# EAGLE board Prairie_Dogs_V1.3 (EAGLE 9.6.2)
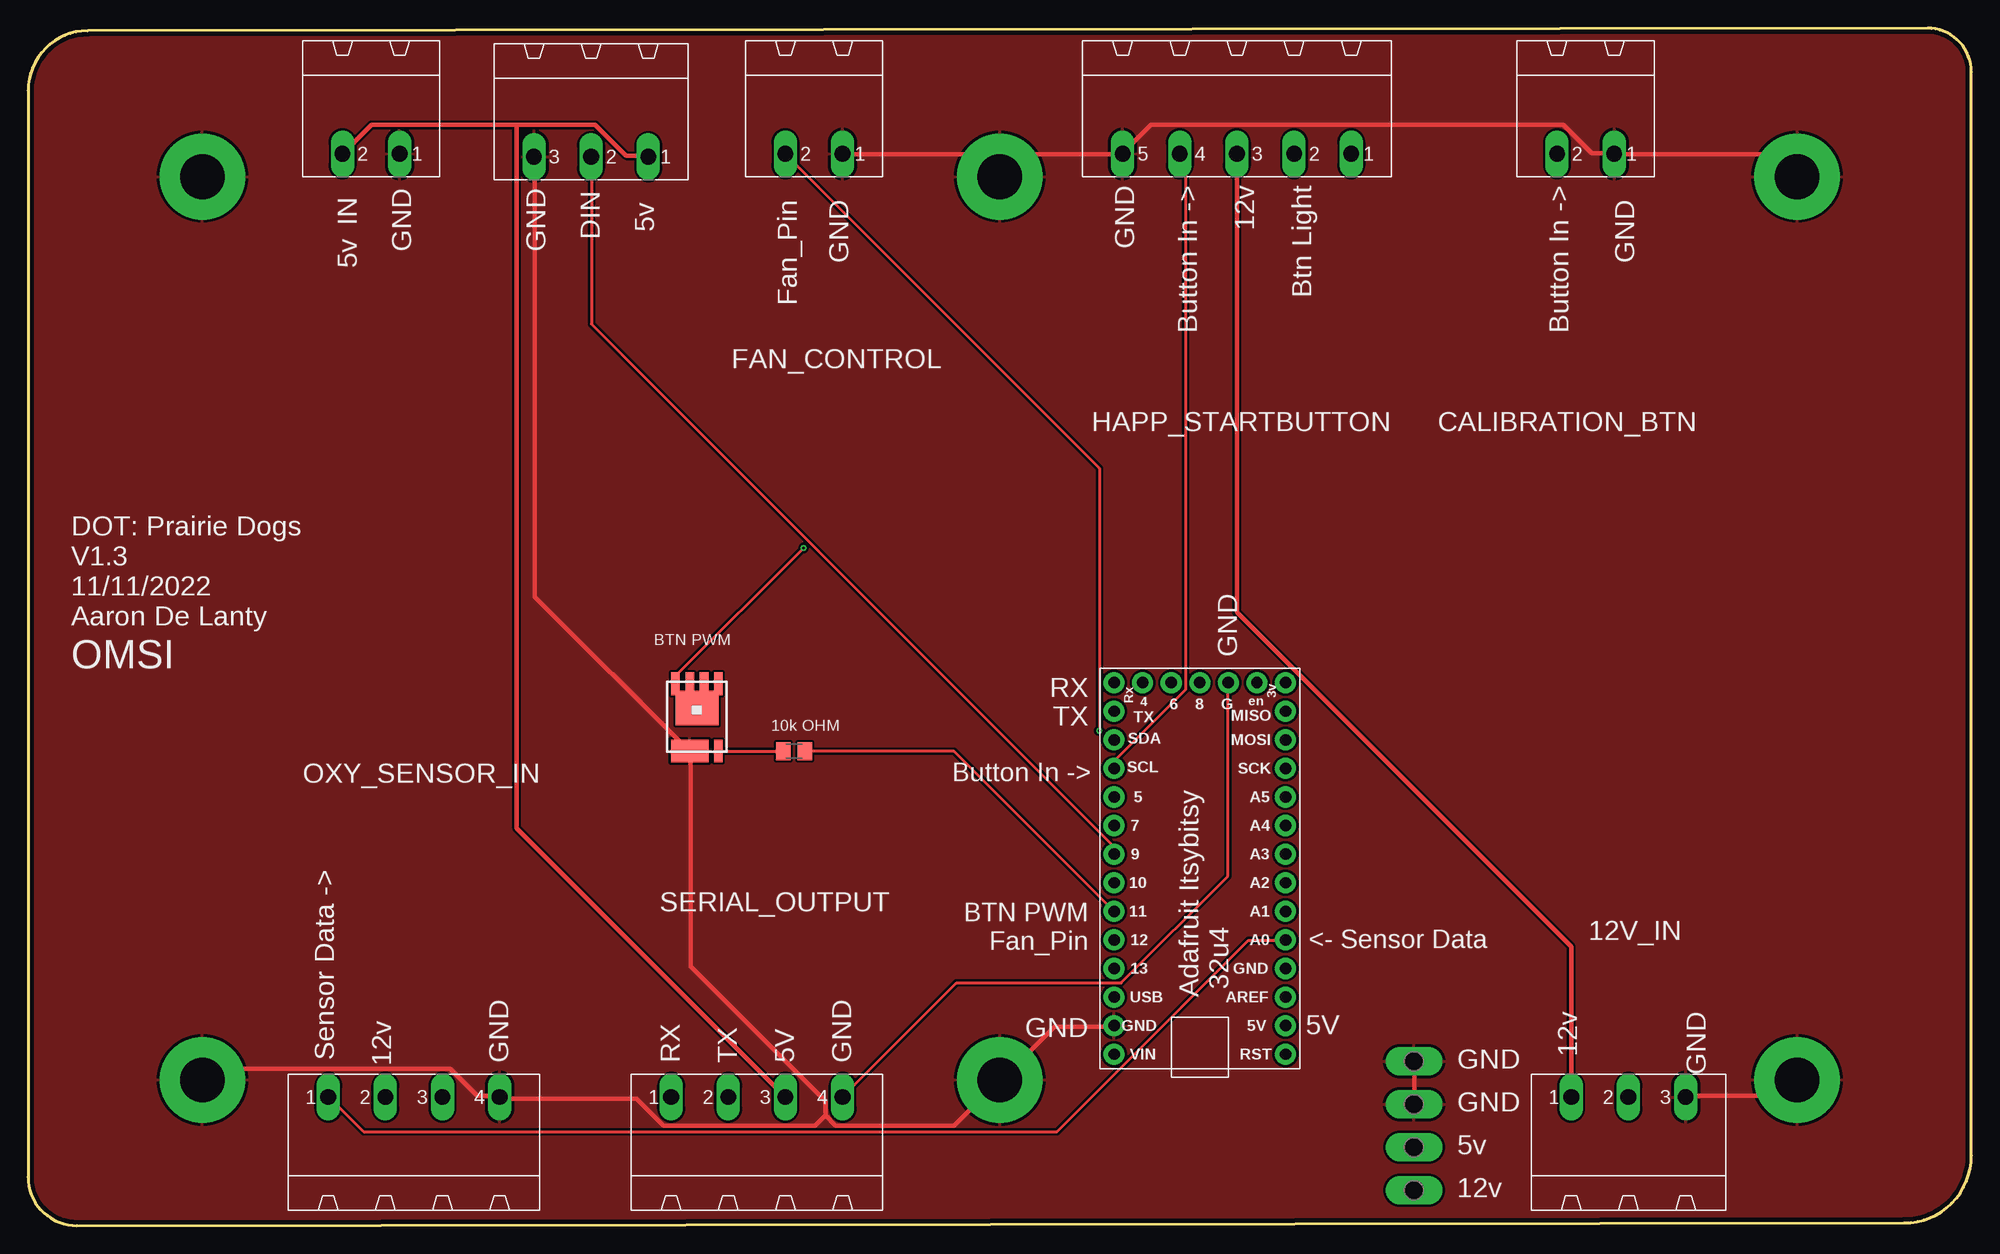
[diagram p0: board, top side]
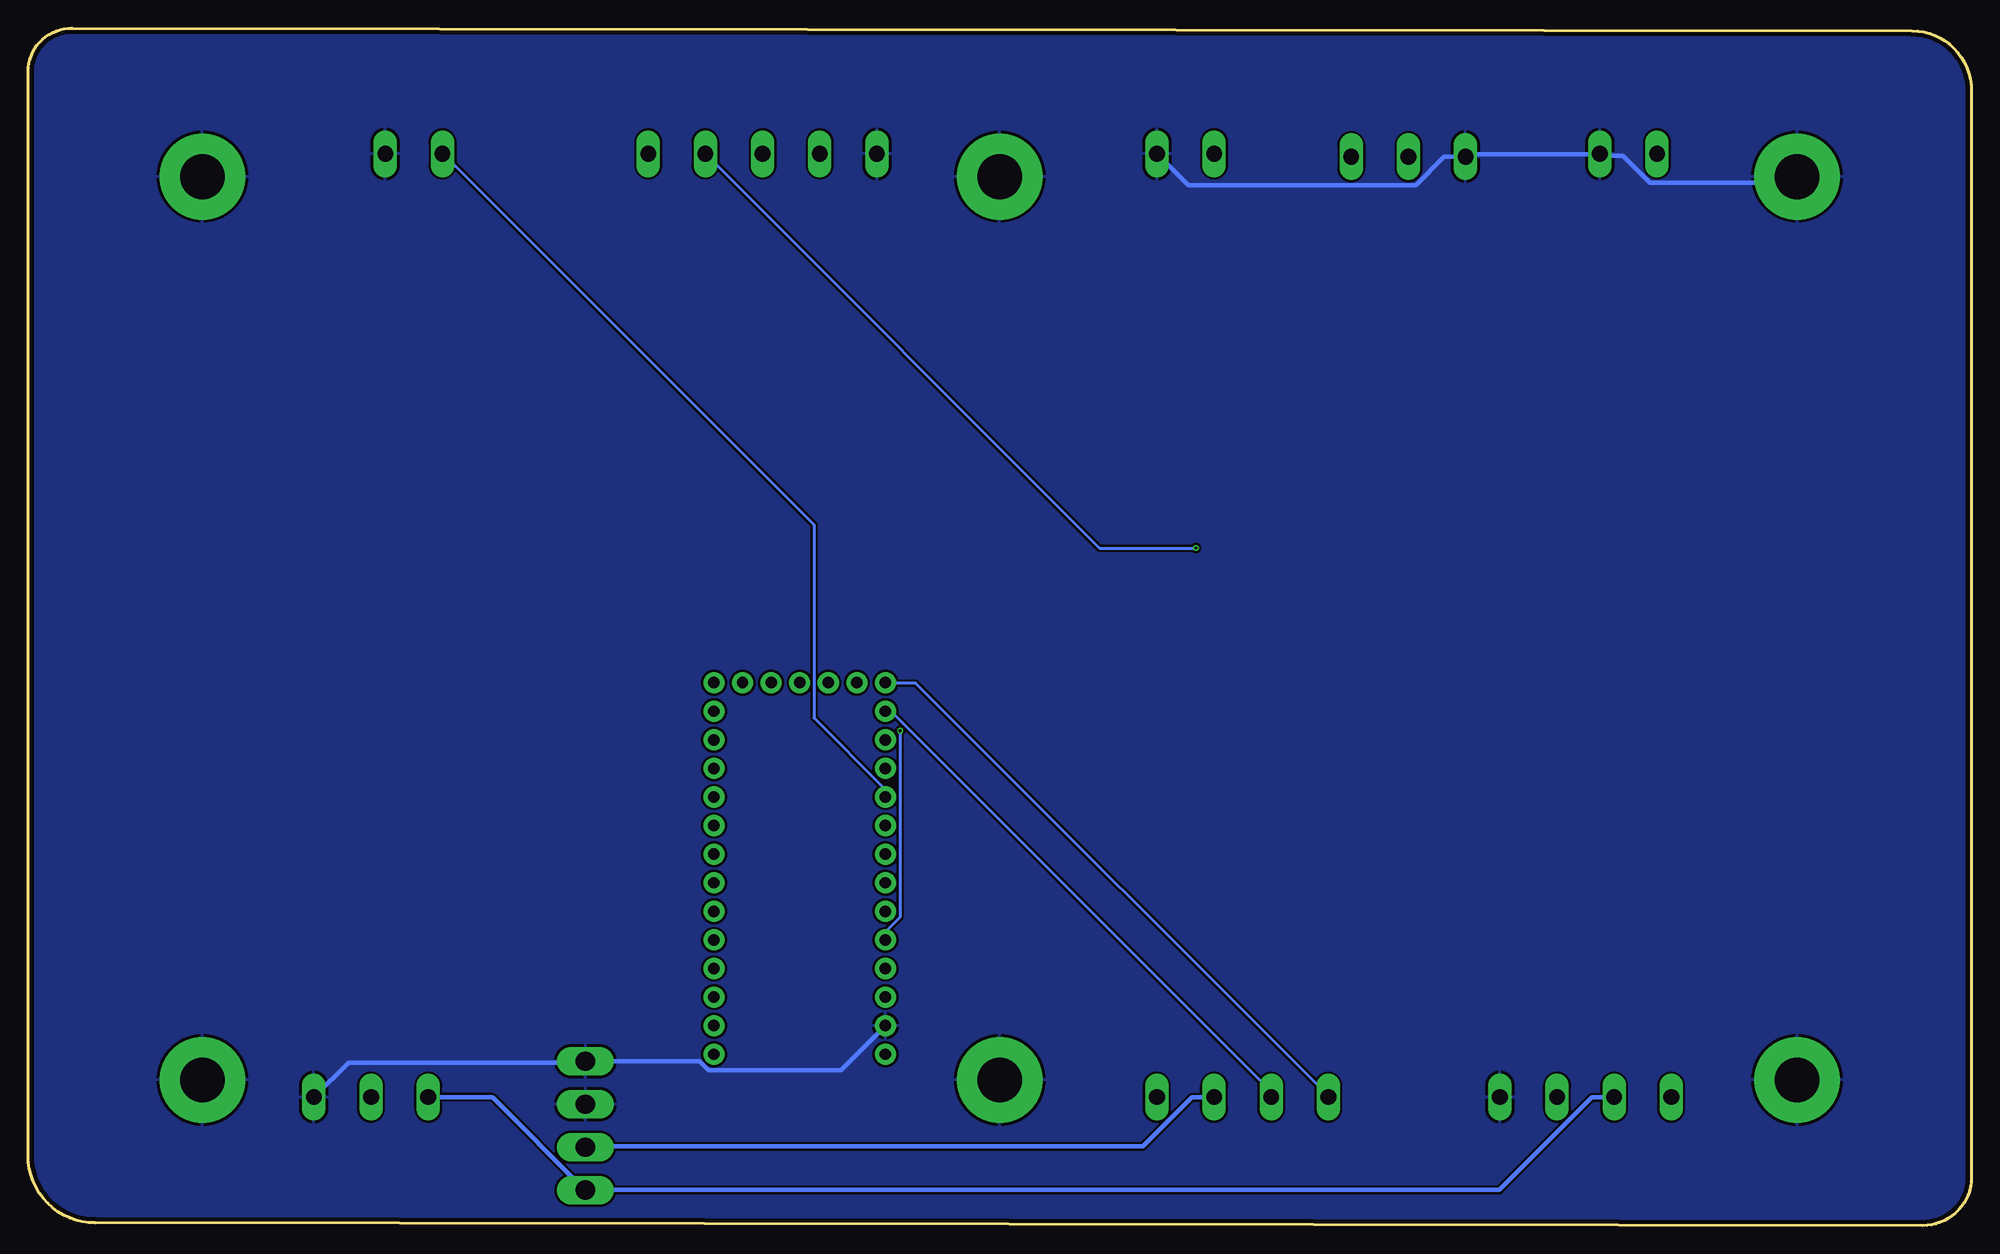
[diagram p1: board, bottom side, seen from below]

Size 172.72 x 106.41 mm. Coordinates in mm from the lower left corner, seen from the top.
Outline: 168.83,106.41 5.28,106.17 arc90 0,100.89 0,4.33 arc90 4.33,0 166.75,0.24 arc90 172.72,6.22 172.72,102.53 arc90 168.83,106.41
Copper layers (1*16): Top 0.035559375mm / dielectric 1.6mm / Bottom 0.035559375mm
Design rules "oshpark-2layer (1) *": minimum track width 10mil, minimum drill 10mil, track to track 8mil, track to pad 8mil, pad to pad 8mil, via to via 8mil, smd to smd 8mil, copper to edge 15mil, drill to drill 6mil, minimum pad ring 5mil, minimum via ring 5mil, stop-mask expansion 2.5mil, vias tented up to drill 25mil, thermal gap 10mil
Net classes: 1 High Power: width 0.406 mm, drill 0.483 mm; 2 Low Power: width 0.305 mm, drill 0.483 mm

## Footprints (pad centres in the part's own frame; a part is rotated, then mirrored left to right if it is on the bottom)
M0805 = smd 1.3 x 1.6: 1 -0.95,0; 2 0.95,0
MSTBA3 = drill 1.397 long: 1 -5.08,5.08; 2 0,5.08; 3 5.08,5.08
MSTBA2 = drill 1.397 long: 1 -2.54,5.08; 2 2.54,5.08
MSTBA5 = drill 1.397 long: 1 -10.16,5.08; 2 -5.08,5.08; 3 0,5.08; 4 5.08,5.08; 5 10.16,5.08
MSTBA4 = drill 1.397 long: 1 -7.62,5.08; 2 -2.54,5.08; 3 2.54,5.08; 4 7.62,5.08
SO-8_POWER_PAK = smd 0.762 x 2.032: D1 -3.423,2.437; D2 -2.153,2.437; D3 -0.883,2.437; D4 0.387,2.437; G 0.387,-3.532 | smd 3.81 x 3.048: D5 -1.518,0.278 | smd 3.302 x 2.032: S -2.153,-3.532
STANDOFF_ELECTRICAL_5_32 = drill 3.969 pad 7.62: P1 0,0
P2-38-17 = drill 1.702 pad 2.121 long: TP-1 -1.905,0; TP-2 1.905,0
ADAFRUIT_LENOARDO = drill 1.016 pad 1.88: 3V -10.16,-21.59; 5V -10.16,8.89; A0 -10.16,1.27; A1 -10.16,-1.27; A2 -10.16,-3.81; A3 -10.16,-6.35; A4 -10.16,-8.89; A5 -10.16,-11.43; AREF -10.16,6.35; D4 2.54,-21.59; D5 5.08,-11.43; D6 0,-21.59; D7 5.08,-8.89; D8 -2.54,-21.59; D9 5.08,-6.35; D10 5.08,-3.81; D11 5.08,-1.27; D12 5.08,1.27; D13 5.08,3.81; EN -7.62,-21.59; GND@0 -10.16,3.81; GND@1 -5.08,-21.59; GND@2 5.08,8.89; MISO -10.16,-19.05; MOSI -10.16,-16.51; RES -10.16,11.43; RX 5.08,-21.59; SCK -10.16,-13.97; SCL 5.08,-13.97; SDA 5.08,-16.51; TX 5.08,-19.05; USB 5.08,6.35; VIN 5.08,11.43
PHOENIX_508_3PIN = drill 1.397 long: 1 -5.08,5.08; 2 0,5.08; 3 5.08,5.08

## Placement (x,y rotation side)
10K  [M0805]  68.07,42.16 0 top
12V_IN  MSTBA3  [MSTBA3]  142.24,6.34 0 top
CALIBRATION_BTN  MSTBA2  [MSTBA2]  138.43,100.32 180 top
FAN_CONTROL  MSTBA2  [MSTBA2]  69.85,100.32 180 top
HAPP_STARTBUTTON  MSTBA5  [MSTBA5]  107.44,100.32 180 top
OXY_SENSOR_IN  MSTBA4  [MSTBA4]  34.29,6.34 0 top
Q1  MOSFET-NCH  [SO-8_POWER_PAK]  60.96,45.71 0 top
S1  STANDOFF_ELECTRICAL5-32  [STANDOFF_ELECTRICAL_5_32]  15.49,93.21 0 top
S2  STANDOFF_ELECTRICAL5-32  [STANDOFF_ELECTRICAL_5_32]  86.36,93.21 0 top
S3  STANDOFF_ELECTRICAL5-32  [STANDOFF_ELECTRICAL_5_32]  157.23,12.95 0 top
S4  STANDOFF_ELECTRICAL5-32  [STANDOFF_ELECTRICAL_5_32]  157.23,93.21 0 top
S6  STANDOFF_ELECTRICAL5-32  [STANDOFF_ELECTRICAL_5_32]  86.36,12.95 0 top
S8  STANDOFF_ELECTRICAL5-32  [STANDOFF_ELECTRICAL_5_32]  15.49,12.95 0 top
SERIAL_OUTPUT  MSTBA4  [MSTBA4]  64.77,6.34 0 top
SPARE_PWM_MOSFET  MSTBA2  [MSTBA2]  30.48,100.32 180 top
TP1  PTR2  [P2-38-17]  123.19,12.69 270 top
TP2  PTR2  [P2-38-17]  123.19,5.07 270 top
U1  ITSYBITSY_5V  [ADAFRUIT_LENOARDO]  101.6,26.66 180 top
X1  PHOENIX_508_3PIN  [PHOENIX_508_3PIN]  50.04,100.07 180 top

## Library data of the parts
10K = adafruit
12V_IN = con-phoenix-508; MF: FARNELL; MPN: 1757255; OC_FARNELL: 3705183; OC_NEWARK: 71C4162
CALIBRATION_BTN FAN_CONTROL SPARE_PWM_MOSFET = th_libraries; MF: FARNELL; MPN: 1757242; OC_FARNELL: 3705171; OC_NEWARK: 71C4161
HAPP_STARTBUTTON = con-phoenix-508; MPN: 1757271; OC_FARNELL: 3705201; OC_NEWARK: 71C4164
OXY_SENSOR_IN SERIAL_OUTPUT = th_libraries; MF: FARNELL; MPN: 1757268; OC_FARNELL: 3705195; OC_NEWARK: 71C4163
Q1 U1 = th_ds_libraries
S1-S4 S6 S8 = th_libraries
TP1 TP2 = testpad
X1 = OMSI_Default_V1; MF: FARNELL; MPN: 1757255; OC_FARNELL: 3705183; OC_NEWARK: 71C4162

## Nets
5V [High Power]: SERIAL_OUTPUT.3 SPARE_PWM_MOSFET.2 TP2.TP-1 X1.1
12V [High Power]: 12V_IN.1 HAPP_STARTBUTTON.3 OXY_SENSOR_IN.2 TP2.TP-2
D11: 10K.2 U1.D11
GND [High Power]: 12V_IN.3 CALIBRATION_BTN.1 FAN_CONTROL.1 HAPP_STARTBUTTON.5 OXY_SENSOR_IN.4 Q1.S S1.P1 S2.P1 S3.P1 S4.P1 S6.P1 S8.P1 SPARE_PWM_MOSFET.1 TP1.TP-1 TP1.TP-2 U1.GND@2 X1.3
N$1: HAPP_STARTBUTTON.2 Q1.D1
N$2: HAPP_STARTBUTTON.4 U1.SCL
N$3: OXY_SENSOR_IN.1 U1.A0
N$5: U1.D9 X1.2
N$6: 10K.1 Q1.G
N$8: SERIAL_OUTPUT.2 U1.TX
N$10: SERIAL_OUTPUT.4 U1.GND@1
N$11: SERIAL_OUTPUT.1 U1.RX
N$12: FAN_CONTROL.2 U1.D12
N$14: CALIBRATION_BTN.2 U1.D5

## Tracks (layer width: path | path; a pad name or v marks a point on that pad's centre or on a via)
5V
  Top 0.406: 43.43,97.82 30.52,97.82 SPARE_PWM_MOSFET.2 | 43.43,97.82 50.41,97.82 53.15,95.08 55.09,95.08 X1.1 | 43.43,97.82 43.43,35.3 SERIAL_OUTPUT.3
  Bottom 0.406: SERIAL_OUTPUT.3 67.32,11.41 69.27,11.41 73.61,7.07 123.1,7.07 TP2.TP-1
12V
  Top 0.406: HAPP_STARTBUTTON.3 107.44,54.5 137.16,24.78 12V_IN.1
  Bottom 0.406: OXY_SENSOR_IN.2 31.77,11.41 33.72,11.41 41.95,3.18 123.1,3.18 TP2.TP-2 123.33,3.3 131.44,11.41 137.16,11.41 12V_IN.1
D11
  Top 0.254: 10K.2 82.3,42.16 U1.D11
GND
  Top 0.406: S4.P1 157.16,93.25 155.22,95.19 141.05,95.19 CALIBRATION_BTN.1 140.82,95.31 138.99,95.31 136.47,97.82 99.78,97.82 97.38,95.42 HAPP_STARTBUTTON.5 97.27,95.19 88.47,95.19 86.53,93.25 S2.P1 86.3,93.25 84.35,95.19 72.47,95.19 FAN_CONTROL.1 | TP1.TP-2 123.22,10.84 123.22,14.5 TP1.TP-1 | 12V_IN.3 147.33,11.53 155.79,11.53 157.16,12.9 S3.P1 | S8.P1 15.54,13.01 16.46,13.93 37.49,13.93 39.89,11.53 41.83,11.53 OXY_SENSOR_IN.4 42.06,11.3 54.06,11.3 56.46,8.9 69.95,8.9 70.87,9.81 | 70.87,9.81 70.87,11.07 58.86,23.07 58.86,42.16 Q1.S 58.64,42.27 45.03,55.87 45.03,94.96 X1.3 | 70.87,9.81 71.78,8.9 82.3,8.9 86.3,12.9 S6.P1 86.53,13.01 91.21,17.7 96.47,17.7 U1.GND@2
  Bottom 0.406: S1.P1 15.54,93.14 16,92.68 28.57,92.68 30.98,95.08 32.92,95.08 SPARE_PWM_MOSFET.1 33.03,95.19 44.81,95.19 44.92,95.08 X1.3 45.15,94.96 46.86,94.96 49.38,92.45 69.61,92.45 72.35,95.19 FAN_CONTROL.1 | 12V_IN.3 144.25,14.5 123.22,14.5 TP1.TP-1 122.99,14.61 113.04,14.61 112.24,13.81 100.47,13.81 96.58,17.7 U1.GND@2
  pour Top: -5.08,107.94 -5.08,-13.98 -6.35,-15.25 181.61,-15.25 186.69,-10.17 186.69,116.83 179.07,124.45 3.81,124.45 -3.81,116.83
  pour Bottom: 3.81,114.29 172.72,114.29 177.8,109.21 179.07,107.94 179.07,-5.09 177.8,-6.36 1.27,-6.36 -10.16,5.07 -10.16,110.48
N$1  (via drill 0.25)
  Top 0.254: v68.92,60.22 57.61,48.9 57.61,48.22 Q1.D1
  Bottom 0.254: v68.92,60.22 77.5,60.22 HAPP_STARTBUTTON.2
N$2
  Top 0.254: HAPP_STARTBUTTON.4 102.87,94.74 102.87,47.64 96.58,41.36 96.58,40.67 U1.SCL
N$3
  Top 0.254: U1.A0 111.67,25.36 108.47,25.36 91.44,8.32 29.83,8.32 26.75,11.41 OXY_SENSOR_IN.1
N$5
  Top 0.254: U1.D9 96.47,33.01 96.47,33.7 50.06,80.11 50.06,94.96 X1.2
N$6
  Top 0.254: 10K.1 61.38,42.16 Q1.G
N$8
  Bottom 0.254: U1.TX 96.47,45.7 96.01,45.7 62.29,11.98 62.29,11.53 SERIAL_OUTPUT.2
N$10
  Top 0.254: U1.GND@1 106.64,48.22 106.64,31.07 97.16,21.58 82.53,21.58 72.47,11.53 SERIAL_OUTPUT.4
N$11
  Bottom 0.254: U1.RX 96.47,48.22 93.84,48.22 57.15,11.53 SERIAL_OUTPUT.1
N$12  (via drill 0.25)
  Top 0.254: v95.21,43.99 95.21,67.3 67.32,95.19 FAN_CONTROL.2
  Bottom 0.254: v95.21,43.99 95.21,27.41 96.47,26.16 96.47,25.47 U1.D12
N$14
  Bottom 0.254: U1.D5 96.58,38.16 96.58,38.84 102.87,45.13 102.87,62.27 135.79,95.19 CALIBRATION_BTN.2

## Text on the board
tPlace: Adafruit Itsybitsy / 32u4
tNames: GND | Button In -> | 12v | Btn Light | Button In -> | GND | GND | 5v | Fan_Pin | GND | GND | IN | DIN | 5v | DOT: Prairie Dogs / V1.3 / 11/11/2022 / Aaron De Lanty | BTN PWM | GND | OMSI | RX | TX | 10k OHM | Button In -> | BTN PWM | Fan_Pin | <- Sensor Data | GND | 12v | GND | 5V | Sensor Data -> | GND | RX | TX | 5V | GND | 12v | GND | GND | 5v | 12v